# Altium PCB test_npf.PcbDoc
Units mil, origin at the board's own origin, x right, y up, seen from the top; angles counter-clockwise.
Board outline 2580 x 2549.62 mil, 2 copper layers (Top Layer, Bottom Layer); 43 components, 38 nets, 206 pads, 22 vias.
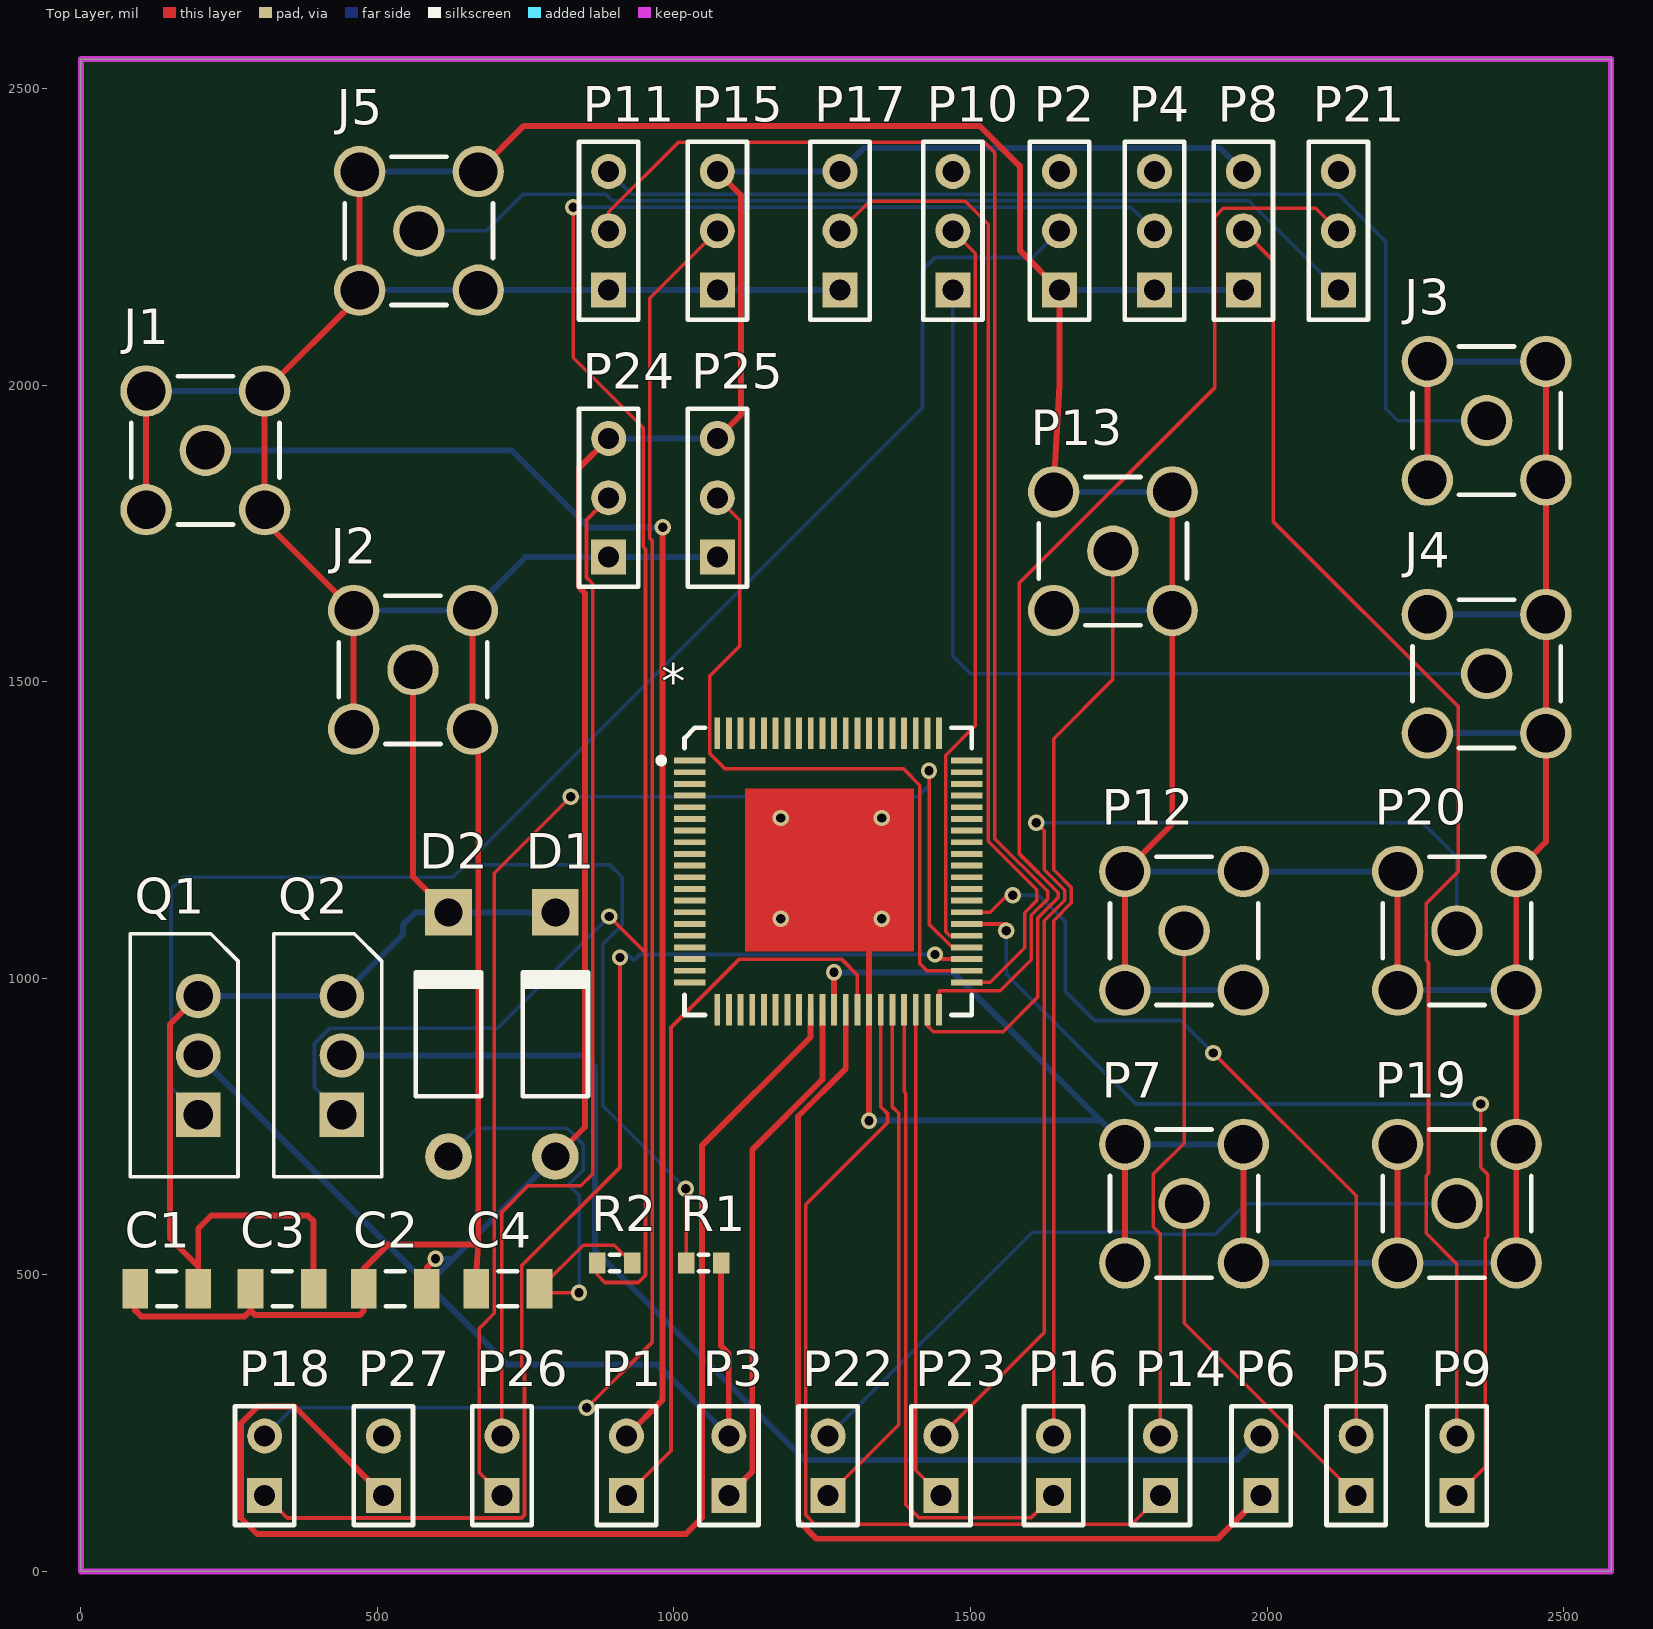
[diagram p0: Top Layer view]
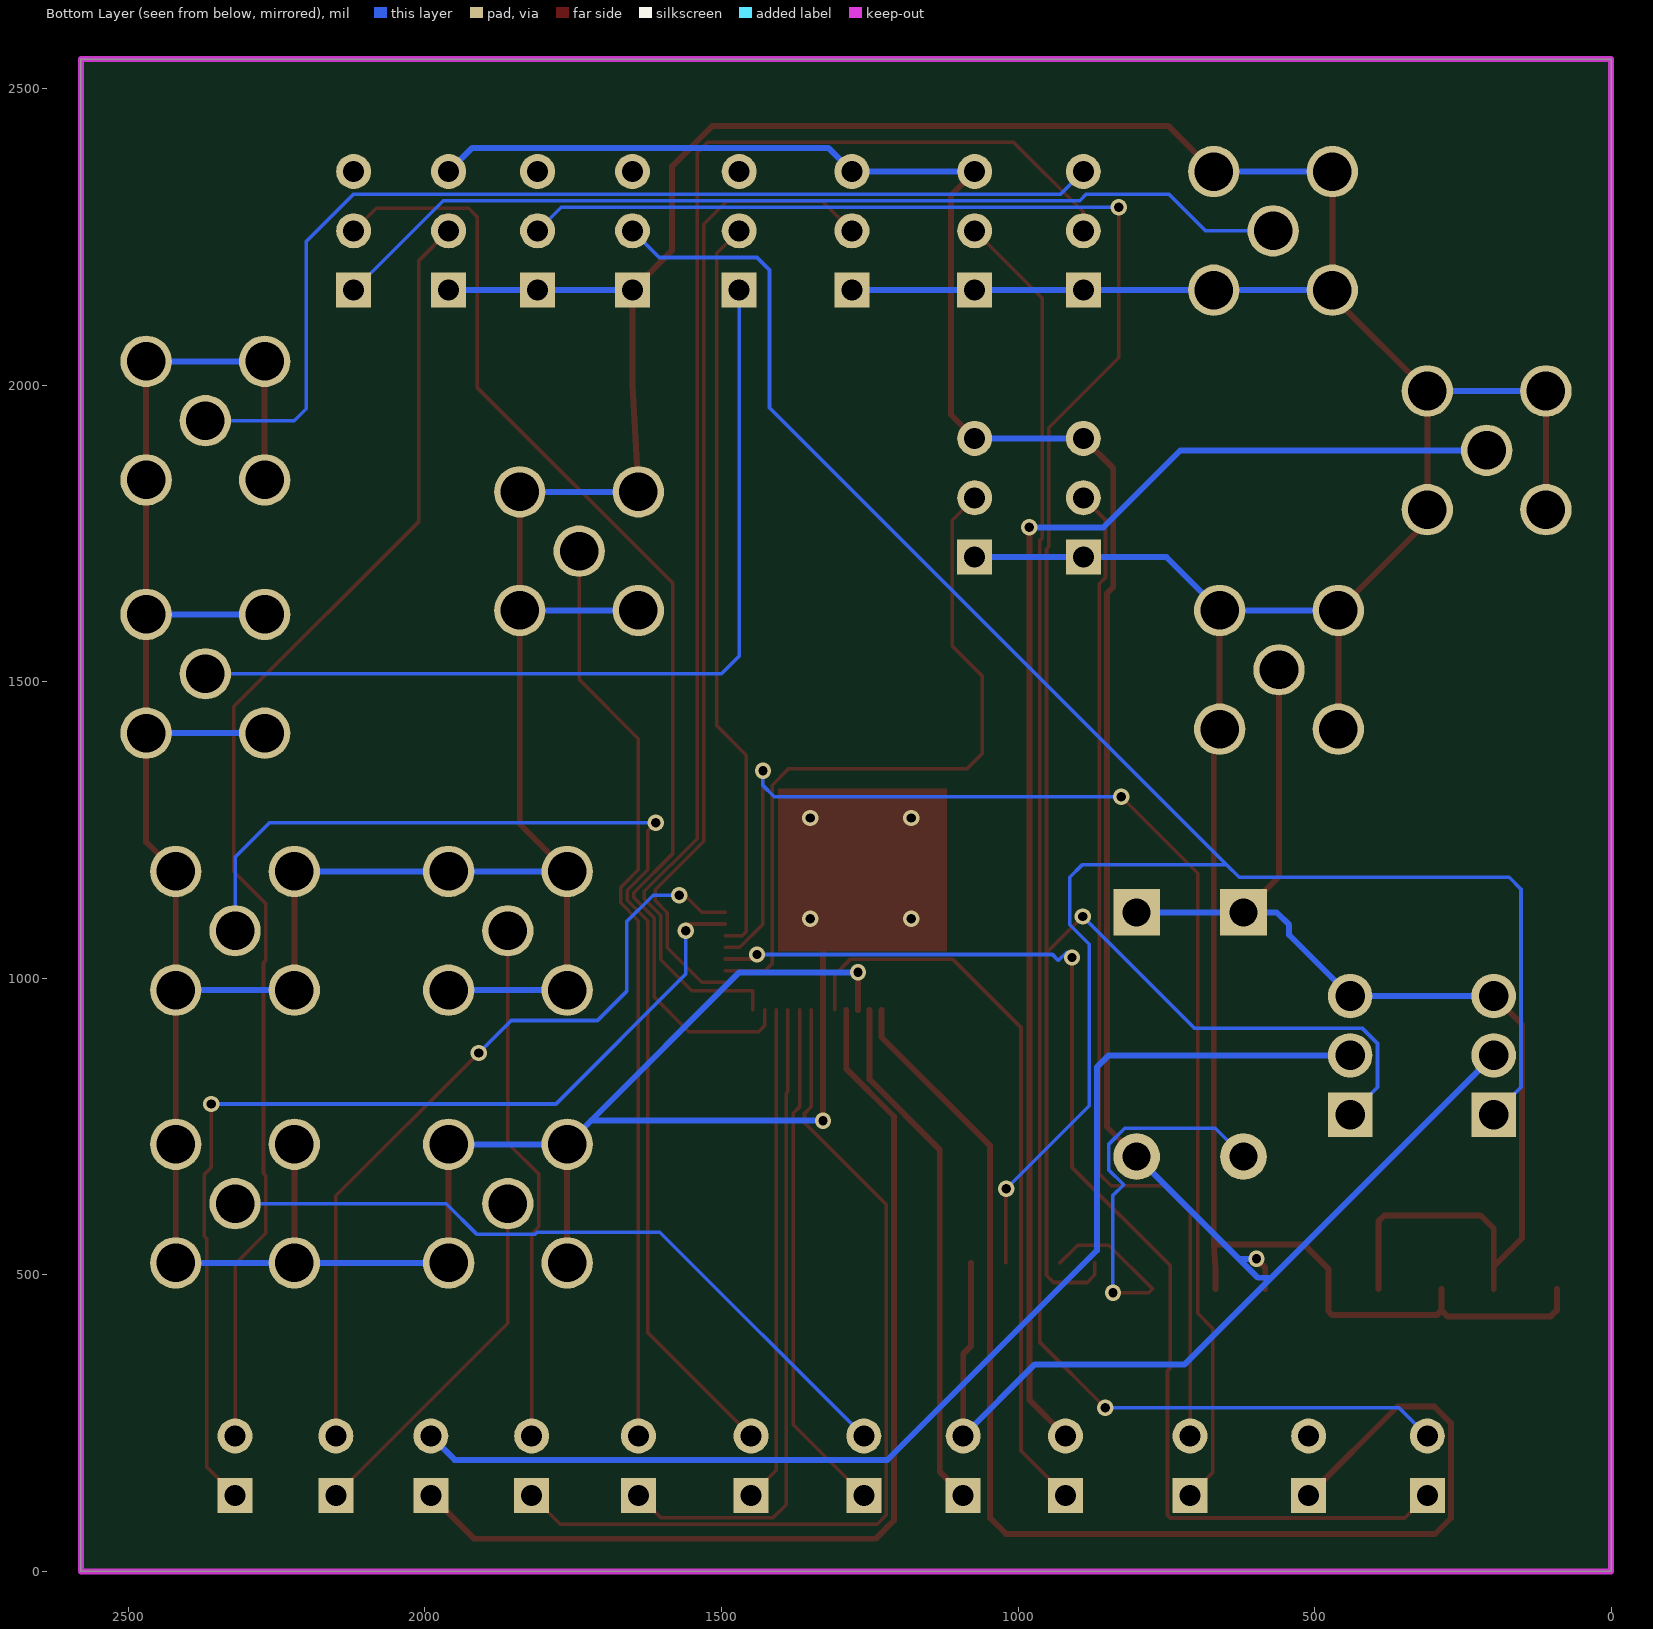
[diagram p1: Bottom Layer view, seen from below]

## Layer stack, top to bottom
Top Solder: solder mask 0.4, Solder Resist, Dk 3.5
Top Layer: signal copper 1.4
Dielectric 1: dielectric 12.6, FR-4, Dk 4.8
Bottom Layer: signal copper 1.4
Bottom Solder: solder mask 0.4, Solder Resist, Dk 3.5

## Board outline
0,0 0,2549.62 2580,2549.62 2580,0

## Design rules (kind name [scope] priority, off if disabled: settings)
BoardOutlineClearance [All] p1: gap=7.87 ignorepadtopadclearanceinfootprint=FALSE
Clearance [All] p1: gap=5 ignorepadtopadclearanceinfootprint=TRUE
MinimumAnnularRing [All] p1: minimumring=3
PolygonConnect [All] p1: connectstyle=Relief reliefconductorwidth=10 reliefentries=4 polygonreliefangle="90 Angle" airgapwidth=10
RoutingVias [All] p1: holewidth=15.75 width=27.56 viastyle="Through Hole" minholewidth=11.81 minwidth=23.62 maxholewidth=248.03 maxwidth=248.03
SolderMaskExpansion [All] p1: expansion=4
Width "Schematic Width Constraint" [InNet('GND')] p1: maxlimit=20 minlimit=8 preferedwidth=10
Width "Schematic Width Constraint_14" [InNet('V3.3')] p2: maxlimit=20 minlimit=8 preferedwidth=10 checkconnectedcopper=TRUE
Width "Schematic Width Constraint_13" [InNet('GND')] p3: maxlimit=20 minlimit=8 preferedwidth=10
Width "Schematic Width Constraint_12" [InNet('NetJ1_1')] p4: maxlimit=20 minlimit=8 preferedwidth=10
Width "Schematic Width Constraint_11" [InNet('Net*_29')] p5: maxlimit=20 minlimit=8 preferedwidth=10
Width "Schematic Width Constraint_10" [InNet('NetP6_2')] p6: maxlimit=20 minlimit=8 preferedwidth=10
Width "Schematic Width Constraint_9" [InNet('Pcbvdd')] p7: maxlimit=20 minlimit=8 preferedwidth=10
Width "Schematic Width Constraint_8" [InNet('Vlink')] p8: maxlimit=20 minlimit=8 preferedwidth=10
Width "Schematic Width Constraint_2" [InNet('V1.8')] p9: maxlimit=20 minlimit=8 preferedwidth=10
Width [All] p10: maxlimit=20 minlimit=5 preferedwidth=6
30 further rules are at their usual default settings.

## Classes and differential pairs
net class test_npf_Nets: 3CLK 3CLK0 3CLK0ba 3CLK180 3CLK180ba 3I_bias 3Set_1 3V_bias 3V_reset 3V_set 3V_sigin 3Vbb GND Net*_1 Net*_2 Net*_3 Net*_4 Net*_5 Net*_6 Net*_7 Net*_8 Net*_9 Net*_10 Net*_11 Net*_12 Net*_13 Net*_14 Net*_15 Net*_16 Net*_17 Net*_18 Net*_19 Net*_20 Net*_21 Net*_22 Net*_23 Net*_24 Net*_25 Net*_26 Net*_27 Net*_28 Net*_29 Net*_33 Net*_47 Net*_48 Net*_49 Net*_50 Net*_51 Net*_52 Net*_53 Net*_54 Net*_55 Net*_56 Net*_57 Net*_58 Net*_59 Net*_60 Net*_61 Net*_62 Net*_63 Net*_64 Net*_65 Net*_66 Net*_67 Net*_68 Net*_69 Net*_70 Net*_71 Net*_72 Net*_73 Net*_74 Net*_75 Net*_76 Net*_77 Net*_78 Net*_79 Net*_80 NetC4_2 NetJ1_1 NetJ3_1 NetJ4_1 NetJ5_1 NetP2_2 NetP2_3 NetP4_2 NetP4_3 NetP5_1 NetP6_2 NetP8_2 NetP10_3 NetP12_1 NetP13_1 NetP15_2 NetP19_1 NetP20_1 NetP21_3 NetP24_2 NetP27_2 Pcbvdd V1.8 V3.3 Vlink

## Components (designator, comment, footprint, x,y, rotation, side; value= is the part's Value field where it differs from the comment)
* "Component_1" LCCS50P1200X1200X85-80N 1260,1180 r0 top
C1 "Cap Semi" C1206 144.85,476.38 r0 top value=100pF
C2 "Cap Semi" C1206 530,476.38 r0 top value=1uF
C3 "Cap Semi" C1206 339.37,476.38 r0 top value=100pF
C4 "Cap Semi" C1206 720,476.38 r0 top value=1uF
D1 "Diode 1N4001" DO-41 800,905.2 r90 top
D2 "Diode 1N4001" DO-41 620,905.2 r90 top
J1 "32K101-400L5" ROS-32K101-400L5_V 210,1890 r0 top
J2 "32K101-400L5" ROS-32K101-400L5_V 560,1520 r0 top
J3 "32K101-400L5" ROS-32K101-400L5_V 2370,1940 r0 top
J4 "32K101-400L5" ROS-32K101-400L5_V 2370,1513.27 r0 top
J5 "32K101-400L5" ROS-32K101-400L5_V 570,2260 r0 top
P1 "Header 2" HDR1X2 920,128.27 r90 top
P2 "Header 3" HDR1X3 1650,2160 r90 top
P3 "Header 2" HDR1X2 1092.36,128.27 r90 top
P4 "Header 3" HDR1X3 1810,2160 r90 top
P5 "Header 2" HDR1X2 2150,128.27 r90 top
P6 "Header 2" HDR1X2 1990,128.27 r90 top
P7 "Sig_out" ROS-32K101-400L5_V 1860,620 r0 top
P8 "Header 3" HDR1X3 1960,2160 r90 top
P9 "Header 2" HDR1X2 2320,128.27 r90 top
P10 "Header 3" HDR1X3 1470,2160 r90 top
P11 "Header 3" HDR1X3 890,2160 r90 top
P12 "32RK241-400L5" ROS-32K101-400L5_V 1860,1080 r0 top
P13 "32RK241-400L5" ROS-32K101-400L5_V 1740,1720 r0 top
P14 "Header 2" HDR1X2 1820,128.27 r90 top
P15 "Header 3" HDR1X3 1072.99,2160 r90 top
P16 "Header 2" HDR1X2 1640,128.27 r90 top
P17 "Header 3" HDR1X3 1280,2160 r90 top
P18 "Header 2" HDR1X2 310,128.27 r90 top
P19 "32RK241-400L5" ROS-32K101-400L5_V 2320,620 r0 top
P20 "32RK241-400L5" ROS-32K101-400L5_V 2319.99,1080 r0 top
P21 "Header 3" HDR1X3 2120,2160 r90 top
P22 "Header 2" HDR1X2 1260,128.27 r90 top
P23 "Header 2" HDR1X2 1450,128.27 r90 top
P24 "Header 3" HDR1X3 890,1710 r90 top
P25 "Header 3" HDR1X3 1072.99,1710 r90 top
P26 "Header 2" HDR1X2 710,128.27 r90 top
P27 "Header 2" HDR1X2 510,128.27 r90 top
Q1 "LM317T" TO254P450X1020X2000-3P 150,970 r90 top
Q2 "LM317T" TO254P450X1020X2000-3P 392,970 r90 top
R1 "Res3" J1-0603 1050,520 r0 top value=3K
R2 "Res3" J1-0603 900,520 r0 top value=3K

## Footprints (in the part's own frame and the unit in brackets; to place one, negate y for a bottom-side part, rotate by r counter-clockwise, add the part's x,y. Pads: shape width x height; smd on the part's side, far side on the other; paste and mask are expansions set on the pad)
C1206 [mm] "Chip Capacitor, Body 3.2x1.6mm, IPC High Density"
  rect 1.1x1.7 smd: 1(-1.35,0) 2(1.35,0)
  silkscreen extent -0.4,-0.75 0.4,0.75, body extent -1.7,-0.9 1.7,0.9, height 1.3
DO-41 [mm] "Diode, Axial; Body 5.2 x 2.7 mm (LxDia. max), Lead Dia. 0.86 mm (max)"
  round 2 hole 1.2: 1(-5.23,0)
  rect 2x2 hole 1.2: 2(5.23,0)
  silkscreen extent -2.65,-1.4 2.75,1.4
HDR1X2 [mm] "Connector; Header; 2 Position"
  rect 1.5x1.5 hole 0.9: 1(0,0)
  round 1.5 hole 0.9: 2(2.54,0)
  silkscreen extent -1.27,-1.27 3.81,1.27
HDR1X3 [mm] "Connector; Header; 3 Position"
  rect 1.5x1.5 hole 0.9: 1(0,0)
  round 1.5 hole 0.9: 2(2.54,0) 3(5.08,0)
  silkscreen extent -1.27,-1.27 6.35,1.27
J1-0603 [mm] "Chip Resistor, Body 1.6x0.8mm, IPC High Density"
  rect 0.7x0.9 smd: 1(-0.75,0) 2(0.75,0)
  silkscreen extent -0.2,-0.35 0.2,0.35, body extent -0.85,-0.48 0.85,0.48, height 0.9
LCCS50P1200X1200X85-80N [mm] "LCC, 80-Pins, Body 12.00x12.00mmx0.85mm, Pitch 0.50mm, IPC Medium Density"
  rect 1.35x0.25 smd: 1(-5.925,4.75) 2(-5.925,4.25) 3(-5.925,3.75) 4(-5.925,3.25) 5(-5.925,2.75) 6(-5.925,2.25) 7(-5.925,1.75) 8(-5.925,1.25) 9(-5.925,0.75) 10(-5.925,0.25) 11(-5.925,-0.25) 12(-5.925,-0.75) 13(-5.925,-1.25) 14(-5.925,-1.75) 15(-5.925,-2.25) 16(-5.925,-2.75) 17(-5.925,-3.25) 18(-5.925,-3.75) 19(-5.925,-4.25) 20(-5.925,-4.75) 41(5.925,-4.75) 42(5.925,-4.25) 43(5.925,-3.75) 44(5.925,-3.25) 45(5.925,-2.75) 46(5.925,-2.25) 47(5.925,-1.75) 48(5.925,-1.25) 49(5.925,-0.75) 50(5.925,-0.25) 51(5.925,0.25) 52(5.925,0.75) 53(5.925,1.25) 54(5.925,1.75) 55(5.925,2.25) 56(5.925,2.75) 57(5.925,3.25) 58(5.925,3.75) 59(5.925,4.25) 60(5.925,4.75)
  rect 0.25x1.35 smd: 21(-4.75,-5.925) 22(-4.25,-5.925) 23(-3.75,-5.925) 24(-3.25,-5.925) 25(-2.75,-5.925) 26(-2.25,-5.925) 27(-1.75,-5.925) 28(-1.25,-5.925) 29(-0.75,-5.925) 30(-0.25,-5.925) 31(0.25,-5.925) 32(0.75,-5.925) 33(1.25,-5.925) 34(1.75,-5.925) 35(2.25,-5.925) 36(2.75,-5.925) 37(3.25,-5.925) 38(3.75,-5.925) 39(4.25,-5.925) 40(4.75,-5.925) 61(4.75,5.925) 62(4.25,5.925) 63(3.75,5.925) 64(3.25,5.925) 65(2.75,5.925) 66(2.25,5.925) 67(1.75,5.925) 68(1.25,5.925) 69(0.75,5.925) 70(0.25,5.925) 71(-0.25,5.925) 72(-0.75,5.925) 73(-1.25,5.925) 74(-1.75,5.925) 75(-2.25,5.925) 76(-2.75,5.925) 77(-3.25,5.925) 78(-3.75,5.925) 79(-4.25,5.925) 80(-4.75,5.925)
  Top Layer region: -3.556,-3.429 3.683,-3.429 3.683,3.556 -3.556,3.556
  Top Layer lines w0.254: 1.75,-5.925 1.75,-4.239 1.75,-3.33
  silkscreen extent -7.27,-6.15 6.15,6.15, body extent -6,-6 6,6, height 0.85
ROS-32K101-400L5_V [mm] "SMA Straight Jack, 6.35x6.35x9.5mm, Rosenberger Recommended"
  round 2.2 hole 1.65: 1(0,0) MH(-2.54,-2.54) MH(-2.54,2.54) MH(2.54,-2.54) MH(2.54,2.54)
  silkscreen extent -3.18,-3.18 3.18,3.18, body extent -3.17,-3.17 3.18,3.18, height 9.5
TO254P450X1020X2000-3P [mil]
  rect 75x75 hole 50: 1(-200,-48)
  round 75 hole 50: 2(-100,-48) 3(0,-48)
  silkscreen extent -305,-115 105,67

## Part data
C1 C2 C3 C4: "Capacitor (Semiconductor SIM Model)", LatestRevisionDate=29-May-2009, LatestRevisionNote="IPC-7351 Footprint Added.", PackageDescription="Chip Capacitor", PackageReference=C1206, Published=8-Jun-2000, Publisher="Altium Limited"
D1 D2: "1 Amp General Purpose Rectifier", Code_JEDEC=DO-204-AL, ComponentLink1Description="Manufacturer Link", ComponentLink1URL=http://www.fairchildsemi.com/, ComponentLink2Description=Datasheet, ComponentLink2URL=http://www.fairchildsemi.com/ds/1N%2F1N4001.pdf, DatasheetVersion=1998, LatestRevisionDate=17-Jul-2002, LatestRevisionNote="Re-released for DXP Platform.", PackageDescription="Diode, Axial; Body 5.2 x 2.7 mm (LxDia. max), Lead Dia. 0.86 mm (max)", PackageReference=DO-41, PackageVersion=Aug-1999, Published=8-Jun-2000, Publisher="Altium Limited"
J1 J2 J3 J4 J5: "SMA Straight Jack, Up to 18 GHz, -55 to 155 degC", ComponentLink1Description="Manufacturer URL", ComponentLink1URL=http://www.rosenberger.de, ComponentLink2Description=Datasheet, ComponentLink2URL=http://rosenberger.de/ok/images/documents/db/32K101-400L5.pdf, ComponentLink3Description="Package Specification", ComponentLink3URL=http://rosenberger.de/ok/images/documents/db/32K101-400L5.pdf, ComponentLink4Description="Series Overview / Design Note", ComponentLink4URL=http://rosenberger.de/ok/images/documents/spez/32.pdf, ComponentLink5Description="Webshop / RFQ", ComponentLink5URL=http://www.rosenberger.com/en/contact/sales/, DatasheetVersion=a00, Design Note="Footprint in library is a generic example - only application specific footprint delivers High Performance", Mounting Technology="Through Hole", PackageDescription="SMA Straight Jack, 6.35 x 6.35 x 9.5 mm", PackageReference=32K101-400L5, PackageVersion=a00, PartNumber=32K101-400L5
P1 P3 P5 P6 P9 P14 P16 P18 P22 P23 P26 P27: "Header, 2-Pin", LatestRevisionDate=17-Jul-2002, LatestRevisionNote="Re-released for DXP Platform.", Publisher="Altium Limited"
P2 P4 P8 P10 P11 P15 P17 P21 P24 P25: "Header, 3-Pin", LatestRevisionDate=17-Jul-2002, LatestRevisionNote="Re-released for DXP Platform.", Publisher="Altium Limited"
P7: library part 32RK241-400L5, "Reverse-SMA Straight Jack, Up to 12.4 GHz, -65 to 165 degC", ComponentLink1Description="Manufacturer URL", ComponentLink1URL=http://www.rosenberger.de, ComponentLink2Description=Datasheet, ComponentLink2URL=http://rosenberger.de/ok/images/documents/db/32RK241-400L5.pdf, ComponentLink3Description="Package Specification", ComponentLink3URL=http://rosenberger.de/ok/images/documents/db/32RK241-400L5.pdf, ComponentLink4Description="Series Overview / Design Note", ComponentLink4URL=http://rosenberger.de/ok/images/documents/spez/32r.pdf, ComponentLink5Description="Webshop / RFQ", ComponentLink5URL=http://www.rosenberger.com/en/contact/sales/, DatasheetVersion=f00, Design Note="Footprint in library is a generic example - only application specific footprint delivers High Performance", Mounting Technology="Through Hole", PackageDescription="Reverse-SMA Straight Jack, 15.215 x 6.35 x 9.7 mm", PackageReference=32RK241-400L5, PackageVersion=f00, PartNumber=32RK241-400L5
P12 P13 P19 P20: "Reverse-SMA Straight Jack, Up to 12.4 GHz, -65 to 165 degC", ComponentLink1Description="Manufacturer URL", ComponentLink1URL=http://www.rosenberger.de, ComponentLink2Description=Datasheet, ComponentLink2URL=http://rosenberger.de/ok/images/documents/db/32RK241-400L5.pdf, ComponentLink3Description="Package Specification", ComponentLink3URL=http://rosenberger.de/ok/images/documents/db/32RK241-400L5.pdf, ComponentLink4Description="Series Overview / Design Note", ComponentLink4URL=http://rosenberger.de/ok/images/documents/spez/32r.pdf, ComponentLink5Description="Webshop / RFQ", ComponentLink5URL=http://www.rosenberger.com/en/contact/sales/, DatasheetVersion=f00, Design Note="Footprint in library is a generic example - only application specific footprint delivers High Performance", Mounting Technology="Through Hole", PackageDescription="Reverse-SMA Straight Jack, 15.215 x 6.35 x 9.7 mm", PackageReference=32RK241-400L5, PackageVersion=f00, PartNumber=32RK241-400L5
Q1 Q2: "LM317 Series 40 Vin 1.5 A Adjustable Positive Voltage Regulator - TO-220-3", Package="TO-220 Texas Instruments", Availability=Unavailable, MF="Texas Instruments", MP=LM317T, Price=None, SnapEDA_Link=https://www.snapeda.com/parts/LM317T/Texas%20Instruments/view-part/?ref=snap
R1 R2: "Resistor", LatestRevisionDate=29-May-2009, LatestRevisionNote="IPC-7351 Footprint Added.", PackageDescription="Chip Resistor", PackageReference=J1-0603, Published=8-Jun-2000, Publisher="Altium Limited"

## Via types
v1: diameter 27.56, hole 15.75, Top Layer to Bottom Layer, 22 vias

## Nets (pads, with @x,y where several pads share a name; then routed paths per layer and width w, separated by ;. In a path a pad name is that pad's centre, name@x,y a point inside that pad or via, vN(x,y) a via of type N, cw(c..) or ccw(c..) an arc to the next point about the centre after c; other vN are vias at no path point)
3CLK: *.39 P21.2 | length 1964.8
  Top Layer w6: *.39 1427.32,920 1437.32,910 1555,910 1613.34,968.34 1613.34,1101.43 1648,1136.09 1648,1143.91 1581.78,1210.13 1581.78,1665.78 1912,1996 1912,2284 1926,2298 2082,2298 P21.2
3CLK0: *.35 P14.1 | length 1538
  Top Layer w6: *.35 1348.58,783.42 1360,772 1360,756.44 1222,618.44 1222,95 1237.26,79.74 1771.47,79.74 P14.1
3CLK0ba: *.36 P22.1 | length 872
  Top Layer w6: P22.1 1378.78,247.05 1378.78,772.27 1368.27,782.78 *.36
3CLK180: *.38 P23.1 | length 836
  Top Layer w6: *.38 1407.64,170.63 P23.1
3CLK180ba: *.37 P16.1 | length 1109.2
  Top Layer w6: *.37 1387.95,809.05 1391,806 1391,112.21 1412.47,90.74 1602.47,90.74 P16.1
3I_bias: *.44 P26.1 | length 2232.5
  Top Layer w6: P26.1 672,166.27 672,410 697,435 697,1177 v1(826,1306) ; v1(1430,1350) 1430,1091.05 1469,1052.05 *.44
  Bottom Layer w6: v1(826,1306) 1411,1306 1430,1325 v1(1430,1350)
3Set_1: *.40 P11.2 | length 2356.8
  Top Layer w6: P11.2 890,2292 1007,2409 1524,2409 1541,2392 1541,1235.36 1630,1146.36 1630,1133.64 1602.34,1105.98 1602.34,1031.34 1550,979 1447.01,979 *.40
3V_bias: *.43 P18.1 | length 2076.3
  Top Layer w6: P18.1 348.27,90 743,90 748,95 748,338 743,343 743,515 909,681 v1(909,1035) ; v1(1440,1040) 1439,1041 1439,1045 1451.64,1032.36 *.43
  Bottom Layer w6: v1(909,1035) 918,1044 932,1030 942,1040 v1(1440,1040)
3V_reset: *.41 P17.2 | length 1671.1
  Top Layer w6: P17.2 1330,2310 1491,2310 1530,2271 1530,1230.8 1611.78,1149.02 1611.78,1130.98 1591.34,1110.54 1591.34,1051.34 1532.99,992.99 *.41
3V_set: *.42 P25.2 | length 1229.1
  Top Layer w6: P25.2 1111,1771.99 1111,1560 1060,1509 1060,1379 1086,1353 1387,1353 1414.44,1325.56 1414.44,1024.76 1426.52,1012.68 *.42
3V_sigin: *.45 P10.2 | length 1255.9
  Top Layer w6: P10.2 1508,2222 1508,1426 1458,1376 1458,1078.73 1465,1071.73 *.45
3Vbb: *.46 P9.1 | length 1728.9
  Top Layer w6: *.46 1560.58,1091.42 1560,1090.84 v1(1560,1080) ; P9.1 2368,176.27 2368,561 2372,565 2372,669 2360,681 v1(2360,788)
  Bottom Layer w6: v1(1560,1080) 1560,1007 1779,788 v1(2360,788)
GND: *.31 *.34 C1.1 C2.1 C3.1 C4.1 J1.MH J2.MH J3.MH J4.MH J5.MH P2.1 P4.1 P7.MH P8.1 P11.1 P12.MH P13.MH P15.1 P17.1 P19.MH P20.MH P24.1 P25.1 | length 14075.6
  Top Layer w10: C1.1 91.7,440 101.7,430 276.22,430 286.22,440 ; J1.MH@110,1790 J1.MH@110,1990 ; C3.1 286.22,440 ; J2.MH@460,1420 460,1620 310,1770 310,1790 310,1990 470,2150 470,2160 J5.MH@470,2360 ; J2.MH@660,1620 660,1420 670,1410 670,550.78 ; C4.1@666.85,476 C4.1 666.85,510 670,550.78 ; J5.MH@670,2360 747,2437 1515,2437 1583,2369 1583,2227 P2.1 1650,2000 P13.MH@1640,1820 ; *.31 v1(1269.84,1009.84) ; v1(1328.9,760) *.34 ; P7.MH@1760,520 P7.MH@1760,720 ; P12.MH@1760,980 1760,1180 1840,1260 1840,1620 P13.MH@1840,1820 ; P7.MH@1960,520 P7.MH@1960,720 ; P19.MH@2220,520 P19.MH@2220,720 ; P20.MH@2220,980 P20.MH@2220,1180 ; J3.MH@2270,1840 J3.MH@2270,2040 ; P19.MH@2420,520 2420,720 2420,980 2420,1180 2470,1230.01 2470,1413.27 2470,1613.27 2470,1840 J3.MH@2470,2040 ; 286.22,440 294.22,432 470,432 476.85,438.85 C2.1 476.85,510 517.63,550.78 670,550.78
  Bottom Layer w10: J1.MH@110,1990 J1.MH@310,1990 ; J2.MH@460,1620 660,1620 749.99,1710 P24.1 P25.1 ; J5.MH@470,2160 670,2160 P11.1 P15.1 P17.1 ; J5.MH@470,2360 J5.MH@670,2360 ; v1(1269.84,1009.84) 1470.16,1009.84 1720,760 ; v1(1328.9,760) 1720,760 ; P13.MH@1640,1620 P13.MH@1840,1620 ; P13.MH@1640,1820 P13.MH@1840,1820 ; P2.1 P4.1 P8.1 ; P12.MH@1760,980 P12.MH@1960,980 ; P12.MH@1760,1180 1960,1180 P20.MH@2220,1180 ; P7.MH@1960,520 2220,520 P19.MH@2420,520 ; P7.MH@1960,720 1760,720 1720,760 ; P20.MH@2220,980 P20.MH@2420,980 ; J4.MH@2270,1413.27 J4.MH@2470,1413.27 ; J4.MH@2270,1613.27 J4.MH@2470,1613.27 ; J3.MH@2270,2040 J3.MH@2470,2040
  other v1: 1180,1100 1350,1100 1180,1270 1350,1270
Net*_29: *.29 P27.1 | length 2205.7
  Top Layer w10: P27.1 360.27,278 298,278 270,250 270,90 297,63 1020,63 1047,90 1047,717.53 1230.47,901 *.29
Net*_33: *.33 P1.1 | length 1251.1
  Top Layer w6: P1.1 995,203.27 995,917 1109.62,1031.62 1283.16,1031.62 1309.21,1005.57 *.33
Net*_47: *.47 P5.2 | length 1352.2
  Top Layer w6: *.47 1533.1,1111.1 1562,1140 v1(1571,1140) ; v1(1909,874) 2150,633 P5.2
  Bottom Layer w6: v1(1571,1140) 1615,1140 1660,1095 1660,977.69 1709,928.69 1854.31,928.69 v1(1909,874)
NetC4_2: C4.2 D2.1 R2.2 | length 794.9
  Top Layer w6: v1(840,470) 779.53,470 C4.2 846.77,550 899.53,550 R2.2
  Bottom Layer w6: D2.1 667.71,747 820,747 847.37,719.63 847.37,677.29 822,651.92 840,633.92 v1(840,470)
NetJ1_1: J1.1 P1.2 | length 2381.8
  Top Layer w10: P1.2 981,289.27 v1(981,1760)
  Bottom Layer w10: J1.1 726,1890 856,1760 v1(981,1760)
NetJ3_1: J3.1 P11.3 | length 1819.2
  Bottom Layer w6: P11.3 928,2322 2120,2322 2200,2242 2200,1960 2220,1940 J3.1
NetJ4_1: J4.1 P10.1 | length 1529.2
  Bottom Layer w6: P10.1 1470,1543.26 1500,1513.26 J4.1
NetJ5_1: J5.1 P21.1 | length 1642.8
  Bottom Layer w6: J5.1 684,2260 746,2322 885,2322 896,2311 1969,2311 P21.1
NetP2_2: P2.2 Q1.1 R1.1 | length 3488.3
  Top Layer w6: v1(1020,645) 1020.47,644.53 R1.1
  Bottom Layer w6: Q1.1 152,816 152,1150 172,1170 627,1170 648,1191 ; v1(1020,645) 880,785 880,1057 913,1090 913,1170 892,1191 648,1191 ; P2.2 1605,2215 1440,2215 1419,2194 1419,1962 648,1191
NetP4_2: P4.2 Q2.1 R2.1 | length 3770.9
  Top Layer w6: v1(830,2300) 830,2046 948.22,1927.78 948.22,1727.22 952,1723.44 952,1043 ; R2.1 870.47,500 883.47,487 940,487 952,499 952,1043 ; v1(891,1104) 952,1043
  Bottom Layer w6: Q2.1 394,816 394,890 420,916 703,916 v1(891,1104) ; v1(830,2300) 1770,2300 P4.2
NetP5_1: P5.1 P7.1 | length 611.9
  Top Layer w6: P7.1 1860,418.26 P5.1
NetP6_2: P6.2 Q2.2 | length 2030.2
  Bottom Layer w10: Q2.2 847,870 867,850 867,541 1220,188 1949.73,188 P6.2
NetP8_2: P8.2 P9.2 | length 2228.9
  Top Layer w6: P8.2 2010,2210 2010,1770 2322,1458 2322,1180 2268,1126 2268,1030 2272,1026 2272,671 2268,667 2268,570 2320,518 P9.2
NetP10_3: P10.3
NetP12_1: P12.1 P14.2 | length 878.2
  Top Layer w6: P14.2 1820,569 1808,581 1808,670 1860,722 P12.1
NetP13_1: P13.1 P16.2 | length 1558
  Top Layer w6: P16.2 1640,1096.97 1670,1126.97 1670,1153.03 1640,1183.03 1640,1404 1740,1504 P13.1
NetP15_2: P15.2 P18.2 | length 2641
  Top Layer w6: v1(853,276) 963,386 963,1738 959.22,1741.78 959.22,2146.23 P15.2
  Bottom Layer w6: P18.2 357.73,276 v1(853,276)
NetP19_1: P19.1 P22.2 | length 1225.6
  Bottom Layer w6: P22.2 1603.73,572 1811,572 1815,568 1912,568 1964,620 P19.1
NetP20_1: P20.1 P23.2 | length 1997.2
  Top Layer w6: P23.2 1624.34,402.61 1624.34,1096.87 1659,1131.53 1659,1148.47 1624.34,1183.13 1624.34,1248.66 v1(1611,1262)
  Bottom Layer w6: v1(1611,1262) 2262,1262 2320,1204 P20.1
NetP21_3: P21.3
NetP24_2: P24.2 P26.2 | length 1717.1
  Top Layer w6: P26.2 710,606 754,650 843,650 863,670 863,1665 852.47,1675.53 852.47,1772.47 P24.2
Pcbvdd: C2.2 D1.1 P3.2 P8.3 P15.3 P17.3 P24.3 P25.3 Q1.2 R1.2 | length 4698.3
  Top Layer w10: C2.2 583.15,512.15 v1(598,527) ; D1.1 850,749.29 850,1648.94 839.47,1659.47 839.47,1859.47 P24.3 ; P25.3 1113,1950.01 1113,2319.99 P15.3 ; R1.2 1079.53,379.83 1092.36,367 P3.2
  Bottom Layer w10: Q1.2 573,495 ; v1(598,527) 627.71,527 ; D1.1 627.71,527 ; P24.3 P25.3 ; P15.3 P17.3 1320,2400 1920,2400 P8.3 ; P3.2 971.63,349 719,349 573,495 ; 573,495 595.71,495 627.71,527
V1.8: *.32 P6.1 | length 1718.3
  Top Layer w10: *.32 1289.53,847.31 1209,766.79 1209,86 1240,55 1916.73,55 P6.1
V3.3: *.30 P3.1 | length 883.8
  Top Layer w10: P3.1 1132,167.9 1132,711 1250.16,829.16 *.30
Vlink: C1.2 C3.2 D1.2 D2.2 J2.1 Q1.3 Q2.3 | length 2022.9
  Top Layer w10: C1.2 198,514 ; Q1.3 150,922 150,562 198,514 ; C3.2 392.52,590 382.52,600 220,600 198,578 198,514 ; J2.1 560,1171.1 D2.2
  Bottom Layer w10: Q1.3 Q2.3 543,1073 543,1090 564.1,1111.1 D2.2 D1.2
pads on no net: *.1 *.2 *.3 *.4 *.5 *.6 *.7 *.8 *.9 *.10 *.11 *.12 *.13 *.14 *.15 *.16 *.17 *.18 *.19 *.20 *.21 *.22 *.23 *.24 *.25 *.26 *.27 *.28 *.48 *.49 *.50 *.51 *.52 *.53 *.54 *.55 *.56 *.57 *.58 *.59 *.60 *.61 *.62 *.63 *.64 *.65 *.66 *.67 *.68 *.69 *.70 *.71 *.72 *.73 *.74 *.75 *.76 *.77 *.78 *.79 *.80 P2.3 P4.3 P27.2

## Keep-outs
Keep-Out Layer:
  the board outline again, w10